# Altium PCB Day10F206.PCBDOC
Units mm, origin at the board's own origin, x right, y up, seen from the top; angles counter-clockwise.
Board outline 152.4 x 101.6 mm, 2 copper layers (Top Layer, Bottom Layer); 39 components, 21 nets, 102 pads, 0 vias.
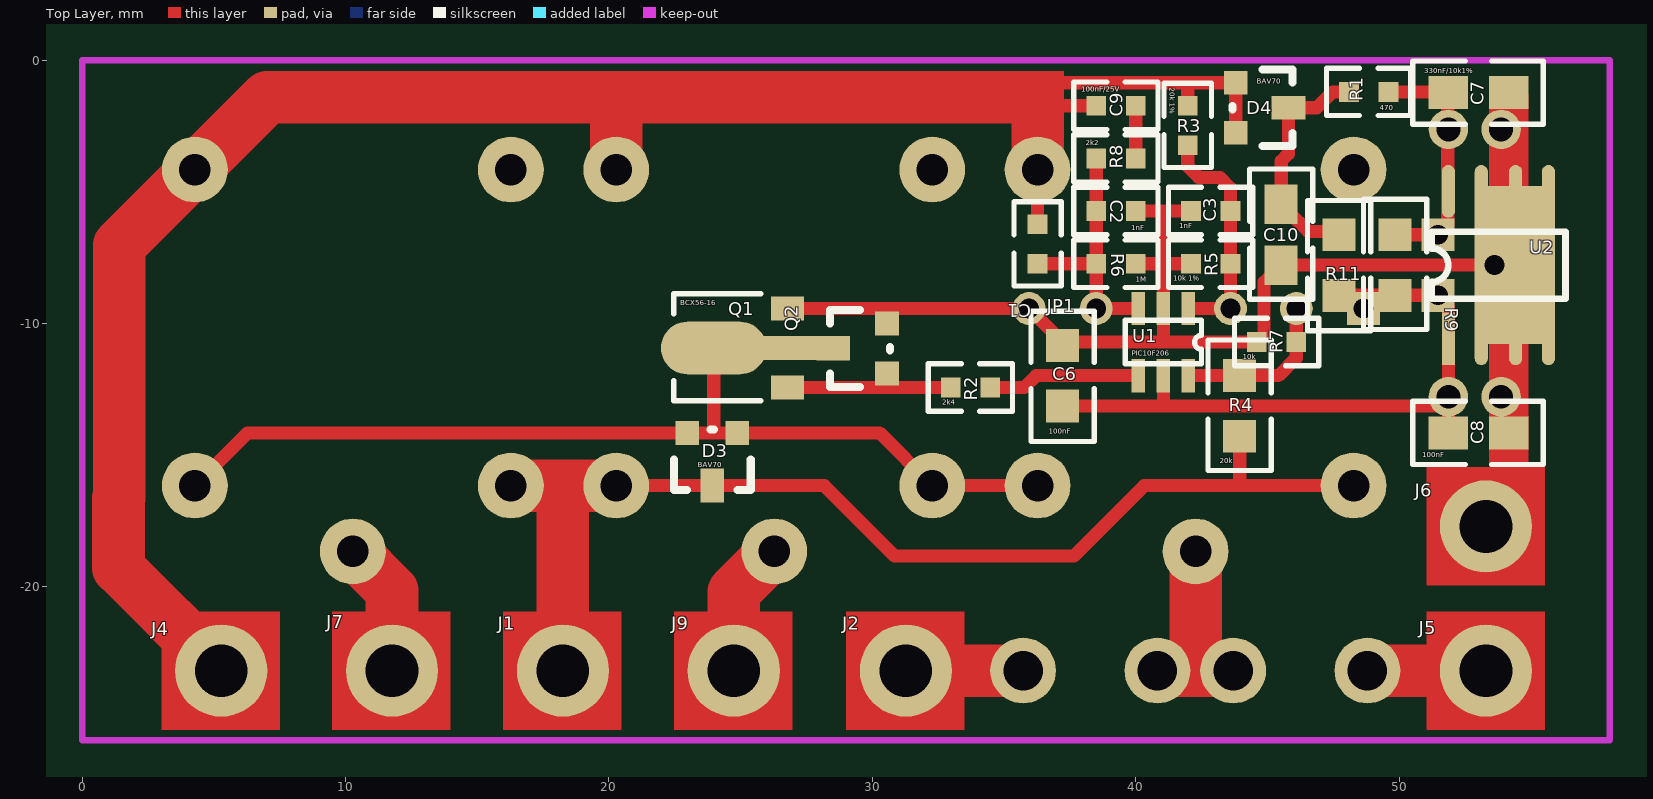
[diagram p0: Top Layer view]
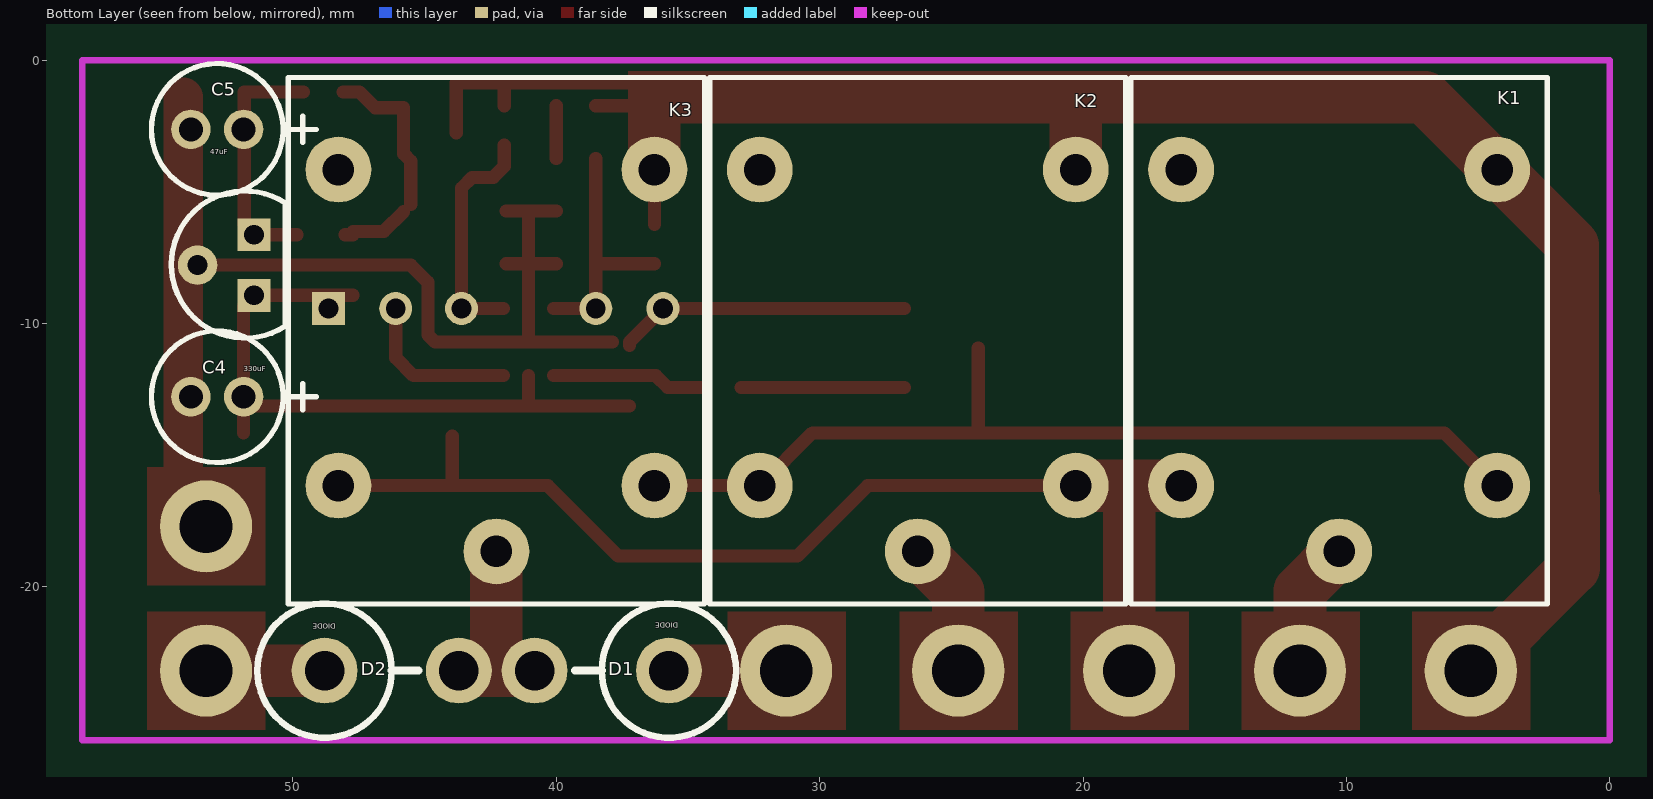
[diagram p1: Bottom Layer view, seen from below]

## Layer stack, top to bottom
Top Layer: signal copper 0.0356
Dielectric: dielectric 0.32, FR-4, Dk 4.8
Bottom Layer: signal copper 0.0356

## Board outline
-23.725,-60.75 128.675,-60.75 128.675,40.85 -23.725,40.85

## Design rules (kind name [scope] priority, off if disabled: settings)
Clearance [All] p1: gap=0.25
ComponentClearance [All] p1 off: gap=0 collisioncheckmode=2
PolygonConnect [All] p1: connectstyle=Relief reliefconductorwidth=0.254 reliefentries=4 polygonreliefangle="90 Angle"
RoutingLayers [All] p1: top layer=Horizontal bottom layer=Vertical
RoutingVias [All] p1: holewidth=0.711 width=1.27 viastyle="Through Hole" minholewidth=0.711 minwidth=1.27 maxholewidth=0.711 maxwidth=1.27
SolderMaskExpansion [All] p1: expansion=0.102
TestPointUsage [All] p1: valid=0 allowmultiple=FALSE
Testpoint [All] p1: side=15 testpointundercomponent=TRUE minsize=1.016 maxsize=2.54 preferedsize=1.524 minholesize=0 maxholesize=1.016 preferedholesize=0.813 testpointgrid=0.025 style=1023 order=-539222988
Width [All] p1: maxlimit=3 minlimit=0.25 preferedwidth=0.254 toplayer_prefwidth=0.5 bottomlayer_prefwidth=0.25 minimp=50.000000 maximp=50.000000 favimp=50.000000
16 further rules are at their usual default settings.

## Components (designator, comment, footprint, x,y, rotation, side; value= is the part's Value field where it differs from the comment)
C1 "100nF" 0603 36.275,-6.225 r270 top
C2 "1nF" 0603 38.5,-5.725 r0 top
C3 "1nF" 0603 42.1,-5.725 r0 top
C4 "330uF" "RA 5MM" 51.875,-12.775 r0 bottom
C5 "47uF" "RA 5MM" 51.875,-2.625 r0 bottom
C6 "100nF" 0805#1 37.225,-13.125 r90 top
C7 "330nF/10k1%" 0805#2 51.875,-1.225 r0 top
C8 "100nF" 0805#2 51.875,-14.15 r0 top
C9 "100nF/25V" 0603 38.5,-1.725 r0 top
C10 "1uF/25V" 0805#2 45.525,-5.475 r270 top (schematic designator C?)
D1 "DIODE" "DIODE0.7 - Radial" 35.725,-23.175 r0 bottom
D2 "DIODE" "DIODE0.7 - Radial" 48.8,-23.175 r180 bottom
D3 "BAV70" SOT-23#1 24.875,-14.15 r180 top
D4 "BAV70" SOT-23#1 43.8,-0.85 r270 top
J1 "CON1" "SIP1 - WIRE" 18.25,-23.175 r90 top (schematic designator J?)
J2 "CON1" "SIP1 - WIRE" 31.275,-23.175 r90 top (schematic designator J?)
J4 "CON1" "SIP1 - WIRE" 5.275,-23.175 r90 top (schematic designator J?)
J5 "CON1" "SIP1 - WIRE" 53.3,-23.175 r90 top (schematic designator J?)
J6 "CON1" "SIP1 - WIRE" 53.3,-17.7 r90 top (schematic designator J?)
J7 "CON1" "SIP1 - WIRE" 11.763,-23.175 r90 top (schematic designator J?)
J9 "CON1" "SIP1 - WIRE" 24.738,-23.175 r90 top (schematic designator J?)
JP1 "HEADER 5" "SIP5 - PGM 2" 48.65,-9.425 r180 top
K1 "RELAY-LF" RELAY5PIN 4.275,-16.15 r0 bottom
K2 "RELAY-RF" RELAY5PIN 20.275,-16.15 r0 bottom
K3 "RELAY-GABARIT" RELAY5PIN 36.275,-16.15 r0 bottom
Q1 "BCX56-16" SOT-89 26.775,-12.425 r90 top
Q2 "MMBT2222A" SOT-23#2 30.55,-11.9 r90 top (schematic designator Q?)
R1 "470" 0603 49.6,-1.2 r180 top
R2 "2k4" 0603 32.975,-12.425 r0 top
R3 "20k 1%" 0603 41.975,-1.725 r270 top
R4 "20k" 0805#1 43.95,-11.975 r270 top
R5 "10k 1%" 0603 42.1,-7.725 r0 top
R6 "1M" 0603 40,-7.725 r180 top
R7 "10k" 0603 44.6,-10.7 r0 top
R8 "2k2" 0603 38.5,-3.725 r0 top
R9 "10k 1%" 0805#1 49.85,-6.625 r270 top
R11 "1k" 0805#1 47.725,-8.925 r90 top
U1 "PIC10F206" "SOT23 - 6" 42,-9.425 r180 top
U2 "VOLTREG" "LINEAR VOLTREG 3" 50.225,-5.475 r270 top

## Footprints (in the part's own frame and the unit in brackets; to place one, negate y for a bottom-side part, rotate by r counter-clockwise, add the part's x,y. Pads: shape width x height; smd on the part's side, far side on the other; paste and mask are expansions set on the pad)
0603 [mm]
  rect 0.75x0.75 smd: 1(0,0) 2(1.5,0)
  silkscreen extent -0.85,-0.9 2.35,0.9
0805#1 [mm]
  rect 1.25x1.25 smd: 1(0,0) 2(2.3,0)
  silkscreen extent -1.35,-1.2 3.6,1.2
0805#2 [mm]
  rect 1.5x1.25 smd: 1(0,0) 2(2.3,0)
  silkscreen extent -1.35,-1.2 3.6,1.2
"DIODE0.7 - Radial" [mm]
  round 2.5 hole 1.5: A(5.1,0) K(0,0)
  silkscreen extent -2.55,-2.55 3.57,2.55
"LINEAR VOLTREG 3" [mm]
  oval 2x0.5 smd: 1(-0.5,1.65) 2(-0.5,5.45) 2(-0.5,4.2) 2(-0.5,2.9) 2(5.1,2.9) 2(5.1,4.2) 2(5.1,5.45)
  rect 1.25x1.25 hole 0.75: 1(1.15,1.25) 3(3.45,1.25)
  round 1.5 hole 0.75: 2(2.3,3.4)
  rect 6x3.05 smd: 2(2.3,4.175)
  rect 2x0.5 smd: 3(5.1,1.65)
  silkscreen extent 1.04,1.01 3.58,6.09
"RA 5MM" [mm]
  round 1.5 hole 0.9: 1(0,0) 2(2,0)
  silkscreen extent -2.77,-2.5 3.5,2.5
RELAY5PIN [mm]
  round 2.5 hole 1.2: 1(6,2.5) 2(0,-12) 3(12,-12) 4(12,0) 5(0,0)
  silkscreen extent -1.9,-15.5 13.9,4.5
"SIP1 - WIRE" [mm] "For Wire 2mm"
  round 3.5 hole 2: 1(0,0)
"SIP5 - PGM 2" [mm]
  rect 1.25x1.25 hole 0.75: 1(0,0)
  round 1.25 hole 0.75: 2(2.55,0) 3(5.05,0) 4(10.15,0) 5(12.7,0)
"SOT23 - 6" [mm]
  rect 0.508x1.27 smd: 1(0,0) 2(0.95,0) 3(1.9,0) 4(1.9,2.55) 5(0.95,2.55) 6(0,2.55)
  silkscreen extent -0.5,0.45 2.4,2.1
SOT-23#1 [mm]
  rect 0.9x0.9 smd: 1(0,0) 3(1.9,0)
  rect 0.9x1.3 smd: 2(0.95,2)
  silkscreen extent -0.51,-0.13 2.41,2.16
SOT-23#2 [mm]
  rect 0.914x0.914 smd: 1(0,0) 3(1.905,0)
  rect 0.914x1.27 smd: 2(0.965,2.032)
  silkscreen extent -0.51,-0.13 2.41,2.16
SOT-89 [mm]
  rect 0.9x1.25 smd: 1(0,0) 3(3,0)
  oval 2x4 smd: 2(1.5,2.8)
  rect 0.9x2.55 smd: 2(1.5,0)
  silkscreen extent -0.51,1.02 3.56,4.32

## Part data
C1 C2 C3 C6 C7 C8 C9 C10: library part CAP, "Capacitor"
C4 C5: library part "CAPACITOR POL", "Capacitor"
D1 D2: "Diode"
D3 D4: library part "DUAL DIODE BAV70"
J1 J2 J4 J5 J6 J7 J9: "Connector"
K1 K2 K3: library part RELAY-SPDT
Q1 Q2: library part NPN1, "NPN Transistor"
R1 R2 R3 R4 R5 R6 R7 R8 R9 R11: library part RES1

## Nets (pads, with @x,y where several pads share a name; then routed paths per layer and width w, separated by ;. In a path a pad name is that pad's centre, name@x,y a point inside that pad or via, vN(x,y) a via of type N, cw(c..) or ccw(c..) an arc to the next point about the centre after c; other vN are vias at no path point)
B: Q1.1 Q2.1 R2.1 | length 6.2
  Top Layer w0.5: Q1.1 R2.1
COIL: D3.1 D3.3 K1.5 K2.4 K3.5 Q1.2 Q2.2 | length 36.9
  Top Layer w0.25: K2.4 K2.4@32.3,-16.125
  Top Layer w0.5: K1.5 6.275,-14.15 30.275,-14.15 K2.4 K3.5 ; 23.975,-14.15 Q1.2@23.975,-10.925
CONTACT: JP1.2 R4.1 R7.2 U1.6 | length 6.3
  Top Layer w0.5: U1.6 45.425,-11.975 46.1,-11.3 JP1.2
GAB: D1.A D2.A K3.1 | length 7.4
  Top Layer w0.25: D1.A@40.8,-23.45 D1.A@40.825,-23.475
  Top Layer w2: D1.A D2.A ; 42.275,-23.175 K3.1
GND: C2.2 C3.1 C4.2 C5.2 C6.2 C7.2 C8.2 C10.2 J6.1 JP1.5 Q1.3 Q2.3 R5.1 R6.1 R7.1 U1.2 U2.2 | length 54.2
  Top Layer w0.5: Q1.3 JP1.5 ; JP1.5@36.275,-9.75 37.225,-10.7 C6.2 ; 37.875,-10.7 R7.1 44.875,-10.425 44.875,-8.425 C10.2 U2.2@53.625,-7.775 ; R6.1 R5.1@41.9,-7.725 ; C2.2 C3.1@41.9,-5.725 ; 41.05,-10.675 41.05,-5.725 ; C8.2@53.875,-13.85 C8.2
  Top Layer w1.5: J6.1@54.175,-17.675 C7.2@54.175,-1.4
IN: C10.1 D4.2 R1.2 R11.2 | length 9
  Top Layer w0.5: C10.1 45.525,-3.825 45.8,-3.55 D4.2 46.875,-1.8 47.475,-1.2 R1.2 ; C10.1@45.8,-5.75 46.55,-6.5 47.725,-6.5 R11.2 R11.2@48.025,-6.625
KL15: D3.2 J1.1 K1.4 K2.5 K3.4 R4.2 | length 45.4
  Top Layer w0.5: K2.5 28.175,-16.15 30.85,-18.825 37.65,-18.825 40.325,-16.15 K3.4 ; 43.95,-16.15 R4.2
  Top Layer w2: K1.4 18.275,-16.15 ; K1.4 K2.5 ; J1.1 18.25,-16.15 ; J1.1@18.275,-23.425 J1.1@18.275,-23.175
LF: J7.1 K1.1 | length 5.4
  Top Layer w2: K1.1 11.763,-20.137 J7.1@11.763,-23.45
LG: D1.K J2.1 | length 4.4
  Top Layer w2: J2.1 D1.K
MEASURE: C3.2 JP1.3 R3.2 R5.2 U1.1 | length 8.9
  Top Layer w0.5: R3.2 41.975,-4.025 42.398,-4.448 43.198,-4.448 43.6,-4.85 C3.2 R5.2 JP1.3 U1.1
NetC9_2: C9.2 R8.2 | length 2
  Top Layer w0.5: R8.2 C9.2
NetK1_3: K1.3
NetK2_3: K2.3
NetK3_3: K3.3
OUT: R2.2 U1.4 | length 5.8
  Top Layer w0.5: R2.2 35.775,-12.425 36.225,-11.975 U1.4
PEAK: C1.2 C2.1 JP1.4 R6.2 R8.1 U1.3 | length 9.5
  Top Layer w0.5: C1.2 R6.2 JP1.4 U1.3 ; R6.2 R8.1
POWER: C1.1 C9.1 D4.1 D4.3 J4.1 K1.2 K2.2 K3.2 R3.1 | length 75
  Top Layer w0.5: 35.45,-0.85 D4.1 D4.3 ; C1.1 K3.2 ; 36.575,-1.725 C9.1 ; R3.1 41.975,-0.85
  Top Layer w2: 1.377,-16.627 1.377,-19.277 J4.1 ; 1.4,-16.627 1.4,-7.025 7.025,-1.4 36.275,-1.4 ; J4.1@5.138,-23.313 J4.1@5.275,-23.45 ; J4.1@5.425,-23.3 J4.1@5.575,-23.45 ; K2.2 20.275,-1.4 ; K3.2 36.275,-2.4
REF: C5.1 C7.1 R1.1 R9.1 U2.1 | length 9.5
  Top Layer w0.5: R1.1 51.85,-1.2 51.85,-6.25 51.475,-6.625 R9.1
RF: J9.1 K2.1 | length 5.4
  Top Layer w2: J9.1@24.738,-23.45 24.738,-20.187 K2.1
RG: D2.K J5.1 | length 4.5
  Top Layer w2: D2.K J5.1
VCC: C4.1 C6.1 C8.1 JP1.1 R9.2 R11.1 U1.5 U2.3 | length 24.9
  Top Layer w0.5: C6.1 C4.1@51.875,-13.125 ; 41.05,-13.125 U1.5 ; R11.1 51.475,-8.925 51.875,-9.325 C8.1

## Keep-outs
Keep-Out Layer:
  lines w0.254: 58,-0.025 58,-25.825 0,-25.825 0,0 58,0

## Other copper
Top Layer:
  rectangle net POWER: 3,-25.425 7.5,-20.925
  rectangle net LF: 9.487,-25.425 13.987,-20.925
  rectangle net KL15: 15.975,-25.425 20.475,-20.925
  rectangle net RF: 22.462,-25.425 26.962,-20.925
  rectangle net GND: 51.05,-19.95 55.55,-15.45
  rectangle net RG: 51.05,-25.425 55.55,-20.925
  rectangle net LG: 29,-25.425 33.5,-20.925
  rectangle net POWER: 33.925,-2.4 37.275,-0.4